# Altium PCB PCB1.PcbDoc (part 2 of 5)
Units mm, origin at the board's own origin, x right, y up, seen from the top; angles counter-clockwise.
Board outline 200 x 110 mm, 4 copper layers (Top Layer, Power Layer, GND Layer, Bottom Layer), stack 1.714 mm thick; 627 components, 400 nets, 2020 pads, 570 vias.
Unrouted connection lines stored in the file: 110.
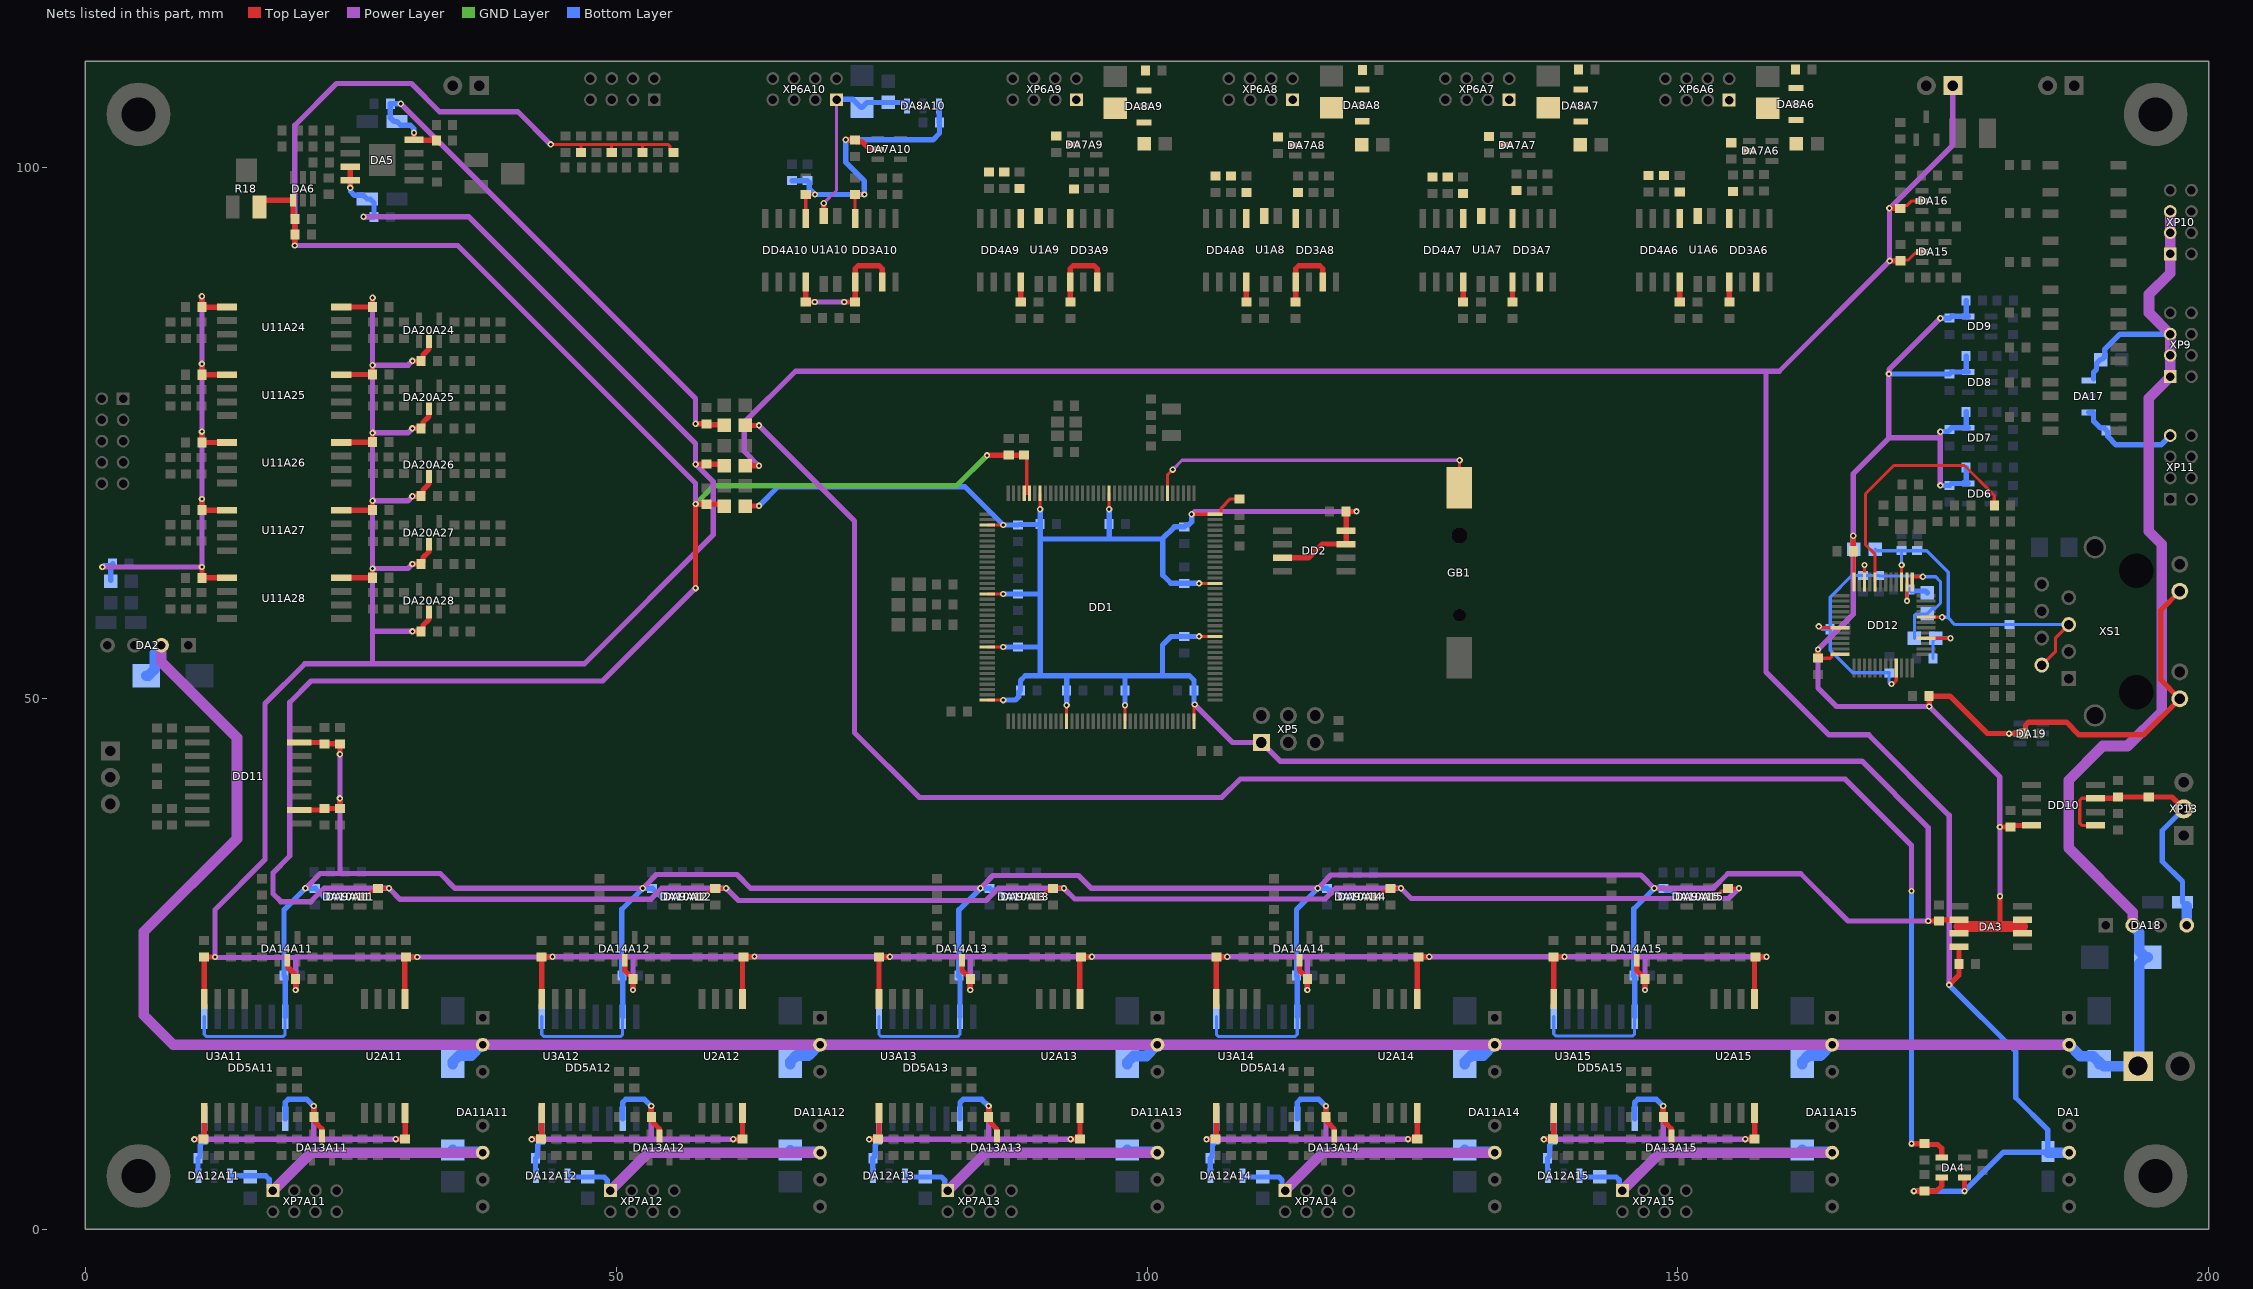
[diagram p4: the nets of this part, all layers, seen from the top]

## Footprints (in the part's own frame and the unit in brackets; to place one, negate y for a bottom-side part, rotate by r counter-clockwise, add the part's x,y. Pads: shape width x height; smd on the part's side, far side on the other; paste and mask are expansions set on the pad) (continued)
B8B-PHDSS [mm]
  rect 1.2x1.2 hole 0.8: 1(0,0)
  round 1.2 hole 0.8: 2(0,2) 3(-2,0) 4(-2,2) 5(-4,0) 6(-4,2) 7(-6,0) 8(-6,2)
  silkscreen extent -7.93,-2.47 1.97,3.52, body extent -7.93,-1.48 1.97,3.52, height 6.5
B10B-PHDSS [mm]
  rect 1.2x1.2 hole 0.8: 1(0,0)
  round 1.2 hole 0.8: 2(0,2) 3(-2,0) 4(-2,2) 5(-4,0) 6(-4,2) 7(-6,0) 8(-6,2) 9(-8,0) 10(-8,2)
  silkscreen extent -9.92,-2.47 1.95,3.5, body extent -9.95,-1.5 1.95,3.5, height 6.5
CAP_0603 [mm]
  rect 0.85x0.95 smd: 1(0.025,0) 2(1.575,0)
  silkscreen extent -0.58,-0.65 2.17,0.65, body extent 0.02,-0.43 1.63,0.44, height 0.8
CAP_0805 [mm]
  rect 1.27x1.27 smd: 1(0,0) 2(2,0)
  silkscreen extent -0.85,-0.85 2.85,0.85, body extent 0,-0.63 2,0.62, height 1
CAP_1206 [mm]
  rect 1.6x1.8 smd: 1(0,0) 2(2.8,0)
  silkscreen extent -1.02,-1.12 3.83,1.12, body extent -0.25,-0.77 2.95,0.83, height 0.94
CAP_A [mm]
  rect 2x1.2 smd: 1(0,0) 2(2.8,0)
  silkscreen extent -2.15,-0.82 4.03,0.82, body extent -0.33,-0.8 3.13,0.8, height 1.65
CAP_B [mm]
  rect 2x2.2 smd: 1(0,0) 2(3,0)
  silkscreen extent -2.15,-1.4 4.25,1.4, body extent -0.25,-1.4 3.25,1.4, height 1.9
CAP_C [mm]
  rect 2.6x2.2 smd: 1(0,0) 2(5,0)
  silkscreen extent -2.4,-1.58 6.53,1.6, body extent -0.5,-1.6 5.5,1.6, height 2.5
DS1092-12-N8S [mm]
  rect 3.9x2.4 smd: 1(0,0) 2(16,0)
  round 1.2 hole 1.2: 1(4,0)
  round 1.5 hole 1.5: 1(11.5,0)
  silkscreen extent 0,-7.37 17.4,7.37, body extent -1.4,-7.37 17.4,7.37, height 4.23
IND_0805 [mm]
  rect 1.27x1.27 smd: 1(0,0) 2(2,0)
  silkscreen extent -0.85,-0.85 2.85,0.85, body extent 0,-0.62 2,0.62, height 0.85
LED_0805 [mm]
  rect 1.27x1.27 smd: 1(0,0) 2(2,0)
  silkscreen extent -0.85,-0.85 3.22,0.85, body extent -0.03,-0.46 2.03,0.45, height 0.85
LPJD0012BENL [mm]
  rect 1.4x1.4 hole 0.9: 1(0,0)
  round 1.4 hole 0.9: 2(1.27,2.54) 3(2.54,0) 4(3.81,2.54) 5(5.08,0) 6(6.35,2.54) 7(7.62,0) 8(8.89,2.54)
  round 1.6 hole 1.02: 9(-1.907,-10.46) 10(0.633,-10.46) 11(8.223,-10.46) 12(10.763,-10.46)
  round 2.1 hole 1.6: 13(-3.475,-2.46) 14(12.365,-2.46)
  round 0 hole 3.25 unplated: ""(-1.27,-6.35) ""(10.16,-6.35)
  silkscreen extent -3.57,-13.08 12.42,3.62, body extent -3.57,-13.08 12.42,3.63, height 17.4
LQFP-48 [mm]
  rect 1.8x0.3 smd: 1(0,0) 2(0,-0.5) 3(0,-1) 4(0,-1.5) 5(0,-2) 6(0,-2.5) 7(0,-3) 8(0,-3.5) 9(0,-4) 10(0,-4.5) 11(0,-5) 12(0,-5.5) 25(8.1,-5.5) 26(8.1,-5) 27(8.1,-4.5) 28(8.1,-4) 29(8.1,-3.5) 30(8.1,-3) 31(8.1,-2.5) 32(8.1,-2) 33(8.1,-1.5) 34(8.1,-1) 35(8.1,-0.5) 36(8.1,0)
  rect 0.3x1.8 smd: 13(1.3,-6.8) 14(1.8,-6.8) 15(2.3,-6.8) 16(2.8,-6.8) 17(3.3,-6.8) 18(3.8,-6.8) 19(4.3,-6.8) 20(4.8,-6.8) 21(5.3,-6.8) 22(5.8,-6.8) 23(6.3,-6.8) 24(6.8,-6.8) 37(6.8,1.3) 38(6.3,1.3) 39(5.8,1.3) 40(5.3,1.3) 41(4.8,1.3) 42(4.3,1.3) 43(3.8,1.3) 44(3.3,1.3) 45(2.8,1.3) 46(2.3,1.3) 47(1.8,1.3) 48(1.3,1.3)
  silkscreen extent -0.13,-5.6 6.9,0.92, body extent -0.45,-7.25 8.55,1.75, height 1.6
LQFP-144 [mm]
  rect 1.45x0.3 smd: 1(0,0) 2(0,-0.5) 3(0,-1) 4(0,-1.5) 5(0,-2) 6(0,-2.5) 7(0,-3) 8(0,-3.5) 9(0,-4) 10(0,-4.5) 11(0,-5) 12(0,-5.5) 13(0,-6) 14(0,-6.5) 15(0,-7) 16(0,-7.5) 17(0,-8) 18(0,-8.5) 19(0,-9) 20(0,-9.5) 21(0,-10) 22(0,-10.5) 23(0,-11) 24(0,-11.5) 25(0,-12) 26(0,-12.5) 27(0,-13) 28(0,-13.5) 29(0,-14) 30(0,-14.5) 31(0,-15) 32(0,-15.5) 33(0,-16) 34(0,-16.5) 35(0,-17) 36(0,-17.5) 73(21.45,-17.5) 74(21.45,-17) 75(21.45,-16.5) 76(21.45,-16) 77(21.45,-15.5) 78(21.45,-15) 79(21.45,-14.5) 80(21.45,-14) 81(21.45,-13.5) 82(21.45,-13) 83(21.45,-12.5) 84(21.45,-12) 85(21.45,-11.5) 86(21.45,-11) 87(21.45,-10.5) 88(21.45,-10) 89(21.45,-9.5) 90(21.45,-9) 91(21.45,-8.5) 92(21.45,-8) 93(21.45,-7.5) 94(21.45,-7) 95(21.45,-6.5) 96(21.45,-6) 97(21.45,-5.5) 98(21.45,-5) 99(21.45,-4.5) 100(21.45,-4) 101(21.45,-3.5) 102(21.45,-3) 103(21.45,-2.5) 104(21.45,-2) 105(21.45,-1.5) 106(21.45,-1) 107(21.45,-0.5) 108(21.45,0)
  rect 0.3x1.45 smd: 37(1.975,-19.475) 38(2.475,-19.475) 39(2.975,-19.475) 40(3.475,-19.475) 41(3.975,-19.475) 42(4.475,-19.475) 43(4.975,-19.475) 44(5.475,-19.475) 45(5.975,-19.475) 46(6.475,-19.475) 47(6.975,-19.475) 48(7.475,-19.475) 49(7.975,-19.475) 50(8.475,-19.475) 51(8.975,-19.475) 52(9.475,-19.475) 53(9.975,-19.475) 54(10.475,-19.475) 55(10.975,-19.475) 56(11.475,-19.475) 57(11.975,-19.475) 58(12.475,-19.475) 59(12.975,-19.475) 60(13.475,-19.475) 61(13.975,-19.475) 62(14.475,-19.475) 63(14.975,-19.475) 64(15.475,-19.475) 65(15.975,-19.475) 66(16.475,-19.475) 67(16.975,-19.475) 68(17.475,-19.475) 69(17.975,-19.475) 70(18.475,-19.475) 71(18.975,-19.475) 72(19.475,-19.475) 109(19.475,1.975) 110(18.975,1.975) 111(18.475,1.975) 112(17.975,1.975) 113(17.475,1.975) 114(16.975,1.975) 115(16.475,1.975) 116(15.975,1.975) 117(15.475,1.975) 118(14.975,1.975) 119(14.475,1.975) 120(13.975,1.975) 121(13.475,1.975) 122(12.975,1.975) 123(12.475,1.975) 124(11.975,1.975) 125(11.475,1.975) 126(10.975,1.975) 127(10.475,1.975) 128(9.975,1.975) 129(9.475,1.975) 130(8.975,1.975) 131(8.475,1.975) 132(7.975,1.975) 133(7.475,1.975) 134(6.975,1.975) 135(6.475,1.975) 136(5.975,1.975) 137(5.475,1.975) 138(4.975,1.975) 139(4.475,1.975) 140(3.975,1.975) 141(3.475,1.975) 142(2.975,1.975) 143(2.475,1.975) 144(1.975,1.975)
  silkscreen extent -0.12,-18.35 20.33,0.85, body extent -0.28,-19.75 21.72,2.25, height 1.63
NX2520SA [mm]
  rect 1.2x1 smd: 1(0,0) 2(1.7,0) 3(1.7,1.3) 4(0,1.3)
  silkscreen extent -0.8,-0.7 2.5,2, body extent -0.4,-0.35 2.1,1.65, height 0.65
NX3215SA [mm]
  rect 1x1.8 smd: 1(0,0) 2(2.5,0)
  silkscreen extent -0.7,-1.1 3.2,1.1, body extent -0.35,-0.75 2.85,0.75, height 0.8
PLD-6 [mm]
  rect 1.6x1.6 hole 1: 1(0,0)
  round 1.6 hole 1: 2(0,2.54) 3(2.54,0) 4(2.54,2.54) 5(5.08,0) 6(5.08,2.54)
  silkscreen extent -1.27,-2.12 6.27,3.81, body extent -1.3,-1.2 6.32,3.8, height 8.5
RES_0603 [mm]
  rect 0.85x0.95 smd: 1(0.025,0) 2(1.575,0)
  silkscreen extent -0.58,-0.65 2.17,0.65, body extent -0.05,-0.48 1.65,0.48, height 0.6
RES_0805 [mm]
  rect 1.27x1.27 smd: 1(0,0) 2(2,0)
  silkscreen extent -0.85,-0.85 2.85,0.85, body extent 0,-0.62 2,0.62, height 0.6
RES_1210 [mm]
  rect 1.6x2.8 smd: 1(-0.025,0.025) 2(2.775,0.025)
  silkscreen extent -1.02,-1.58 3.77,1.63, body extent -0.15,-1.28 2.95,1.33, height 0.57
SOIC-8 [mm]
  rect 1.8x0.6 smd: 1(0,0) 2(0,-1.25) 3(0,-2.55) 4(0,-3.8) 5(6,-3.8) 6(6,-2.55) 7(6,-1.25) 8(6,0)
  silkscreen extent -0.12,-4.38 4.8,0.87, body extent -0.13,-4.37 6.08,0.63, height 1.75
"SOIC-8 EPAD" [mm]
  rect 1.8x0.6 smd: 1(0,0) 2(0,-1.25) 3(0,-2.55) 4(0,-3.8) 5(6,-3.8) 6(6,-2.55) 7(6,-1.25) 8(6,0)
  rect 2.5x3 smd: EPAD(3,-1.9)
  silkscreen extent -0.13,-4.38 4.8,0.87, body extent -0.13,-4.37 6.08,0.63, height 1.75
SOIC-16IC [mm]
  rect 2.3x0.6 smd: 1(0,0) 2(0,-1.27) 3(0,-2.54) 4(0,-3.81) 5(0,-5.08) 6(0,-6.35) 7(0,-7.62) 8(0,-8.89) 9(9.6,-8.89) 10(9.6,-7.62) 11(9.6,-6.35) 12(9.6,-5.08) 13(9.6,-3.81) 14(9.6,-2.54) 15(9.6,-1.27) 16(9.6,0)
  silkscreen extent -0.15,-10.9 8.03,2, body extent -0.38,-10.9 9.93,2, height 2.64
SOIC-16W [mm]
  rect 2.3x0.6 smd: 1(0,0) 2(0,-1.27) 3(0,-2.54) 4(0,-3.81) 5(0,-5.08) 6(0,-6.35) 7(0,-7.62) 8(0,-8.89) 9(9.6,-8.89) 10(9.6,-7.62) 11(9.6,-6.35) 12(9.6,-5.08) 13(9.6,-3.81) 14(9.6,-2.54) 15(9.6,-1.27) 16(9.6,0)
  silkscreen extent -0.15,-9.9 8.03,1, body extent -0.52,-9.7 10.11,0.8, height 2.62
SOT-23-3 [mm]
  rect 1.2x0.55 smd: 1(0,0) 2(0,-1.9) 3(2.15,-0.95)
  silkscreen extent -0.27,-2.5 2,0.65, body extent -0.15,-2.45 2.35,0.55, height 1
SOT-23-5 [mm]
  rect 1.2x0.55 smd: 1(0,0) 2(0,-0.95) 3(0,-1.9) 4(2.15,-1.9) 5(2.15,0)
  silkscreen extent -0.27,-2.5 1.97,0.65, body extent -0.15,-2.45 2.35,0.55, height 1.1
SOT-23-6 [mm]
  rect 1.2x0.55 smd: 1(0,0) 2(0,-0.95) 3(0,-1.9) 4(2.15,-1.9) 5(2.15,-0.95) 6(2.15,0)
  silkscreen extent -0.27,-2.5 1.97,0.65, body extent -0.3,-2.4 2.5,0.5, height 1.18
SOT-89 [mm]
  rect 0.57x1.4 smd: 1(0,0) 3(3,0)
  rect 0.65x1.4 smd: 2(1.5,0)
  Top Layer region: 1.825,0.7 2.5,1.375 2.5,3.825 0.5,3.825 0.5,1.375 1.175,0.7 1.175,-0.7 1.825,-0.7
  Top Layer lines w0.2: 1.5,-0.075 1.5,0
  silkscreen extent -0.82,-0.07 3.75,3, body extent -0.75,-0.43 3.75,3.57, height 1.5
SSO-8 [mm]
  rect 1.905x0.64 smd: 1(0,0) 2(0,-1.275) 3(0,-2.55) 4(0,-3.825) 5(10.75,-3.825) 6(10.75,-2.55) 7(10.75,-1.275) 8(10.75,0)
  silkscreen extent -0.12,-4.82 9,1.02, body extent -0.33,-4.82 11.18,1.03, height 3.61
"TME (SIP-4)" [mm]
  rect 1.4x1.4 hole 0.8: 1(0,0)
  round 1.4 hole 0.8: 2(2.54,0) 3(5.08,0) 4(7.62,0)
  silkscreen extent -1.9,-1.7 9.6,5.4, body extent -1.9,-1.7 9.6,5.4, height 10.2
"TMR3 (SIP-8)" [mm]
  rect 1.3x1.3 hole 0.7: 1(0,0)
  round 1.3 hole 0.7: 2(2.54,0) 3(5.08,0) 5(10.16,0) 6(12.7,0) 7(15.24,0) 8(17.78,0)
  silkscreen extent -2,-5.58 19.8,3.5, body extent -2,-5.6 19.8,3.5, height 11.2

## Part data
C1 C2 C3 C4 C37 C40 C54A6 C54A7 C54A8 C54A9 C54A10 C57A11 C57A12 C57A13 C57A14 C57A15 C59A11 C59A12 C59A13 C59A14 C59A15 C91 C94: library part Capacitor_Polar
  C1 C2 C57A11 C57A12 C57A13 C57A14 C57A15 C91: Model="TECAP, 10 мкФ, 35 В, тип C, 10%"
  C3 C4 C37 C40 C94: Model="TECAP, 10 мкФ, 10 В, тип A, 10%"
  C54A6 C54A7 C54A8 C54A9 C54A10 C59A11 C59A12 C59A13 C59A14 C59A15: Model="TECAP, 10 мкФ, 25 В, тип B, 10%"
C5 C6 C7 C8 C9 C10 C11 C13 C14 C15 C16 C17 C18 C20 C21 C22 C23 C24 C25 C26 C27 C28 C29 C30 C31 C32 C33 C34 C35 C36 C38 C39 C41 C42 C43 C44 C45A2 C45A3 C45A4 C45A5 C46A6 C46A7 C46A8 C46A9 C46A10 C47A6 C47A7 C47A8 C47A9 C47A10 C48A6 C48A7 C48A8 C48A9 C48A10 C49A6 C49A7 C49A8 C49A9 C49A10 C50A6 C50A7 C50A8 C50A9 C50A10 C51A6 C51A7 C51A8 C51A9 C51A10 C52A6 C52A7 C52A8 C52A9 C52A10 C53A6 C53A7 C53A8 C53A9 C53A10 C55A11 C55A12 C55A13 C55A14 C55A15 C56A11 C56A12 C56A13 C56A14 C56A15 C58A11 C58A12 C58A13 C58A14 C58A15 C60A11 C60A12 C60A13 C60A14 C60A15 C61A11 C61A12 C61A13 C61A14 C61A15 C62A11 C62A12 C62A13 C62A14 C62A15 C63A11 C63A12 C63A13 C63A14 C63A15 C64A11 C64A12 C64A13 C64A14 C64A15 C65A11 C65A12 C65A13 C65A14 C65A15 C66A11 C66A12 C66A13 C66A14 C66A15 C67A11 C67A12 C67A13 C67A14 C67A15 C68A11 C68A12 C68A13 C68A14 C68A15 C69A11 C69A12 C69A13 C69A14 C69A15 C70A11 C70A12 C70A13 C70A14 C70A15 C71A11 C71A12 C71A13 C71A14 C71A15 C72A11 C72A12 C72A13 C72A14 C72A15 C73A11 C73A12 C73A13 C73A14 C73A15 C74A11 C74A12 C74A13 C74A14 C74A15 C75A11 C75A12 C75A13 C75A14 C75A15 C76A11 C76A12 C76A13 C76A14 C76A15 C77 C78 C79 C80 C81 C82 C83 C84 C85 C86 C87 C88 C89 C90 C92 C93 C95 C96 C97 C98 C99 C100 C101 C102 C103 C104 C106 C107 C108 C109 C111 C113 C114 C115 C116 C117 C118 C119 C120 C121A24 C121A25 C121A26 C121A27 C121A28 C122A24 C122A25 C122A26 C122A27 C122A28 C123A24 C123A25 C123A26 C123A27 C123A28 C124A24 C124A25 C124A26 C124A27 C124A28 C125A24 C125A25 C125A26 C125A27 C125A28 C126A24 C126A25 C126A26 C126A27 C126A28 C127A24 C127A25 C127A26 C127A27 C127A28: library part Capacitor, Manufacturer=Murata
  C5 C6 C7 C10 C14 C16 C17 C18 C21 C23 C24 C25 C26 C27 C28 C29 C30 C32 C33 C34 C35 C38 C39 C41 C43 C45A2 C45A3 C45A4 C45A5 C46A6 C46A7 C46A8 C46A9 C46A10 C47A6 C47A7 C47A8 C47A9 C47A10 C48A6 C48A7 C48A8 C48A9 C48A10 C49A6 C49A7 C49A8 C49A9 C49A10 C52A6 C52A7 C52A8 C52A9 C52A10 C53A6 C53A7 C53A8 C53A9 C53A10 C56A11 C56A12 C56A13 C56A14 C56A15 C58A11 C58A12 C58A13 C58A14 C58A15 C60A11 C60A12 C60A13 C60A14 C60A15 C61A11 C61A12 C61A13 C61A14 C61A15 C64A11 C64A12 C64A13 C64A14 C64A15 C66A11 C66A12 C66A13 C66A14 C66A15 C67A11 C67A12 C67A13 C67A14 C67A15 C68A11 C68A12 C68A13 C68A14 C68A15 C71A11 C71A12 C71A13 C71A14 C71A15 C72A11 C72A12 C72A13 C72A14 C72A15 C73A11 C73A12 C73A13 C73A14 C73A15 C76A11 C76A12 C76A13 C76A14 C76A15 C78 C79 C82 C86 C87 C88 C90 C92 C93 C95 C96 C98 C101 C102 C104 C106 C107 C108 C109 C111 C113 C114 C115 C116 C117 C118 C119 C120 C121A24 C121A25 C121A26 C121A27 C121A28 C123A24 C123A25 C123A26 C123A27 C123A28 C125A24 C125A25 C125A26 C125A27 C125A28 C127A24 C127A25 C127A26 C127A27 C127A28: Model=GRM188R71H104KA93D
  C8 C11 C15 C97 C103: Model=GRM188R61E106KA73D
  C9 C50A6 C50A7 C50A8 C50A9 C50A10 C77 C83 C84 C85 C89: Model=GRM188R61H105KAALD
  C13 C20: Model=GRM1885C1H180FA01D
  C22 C31 C44: Model=GRM188R61H225KE11D
  C36 C42: Model=GRM1885C1H220JA01D
  C51A6 C51A7 C51A8 C51A9 C51A10 C65A11 C65A12 C65A13 C65A14 C65A15 C81: Model=GRM219R71H334KA88D
  C55A11 C55A12 C55A13 C55A14 C55A15: Model=GRM188R71H103JA01D
  C62A11 C62A12 C62A13 C62A14 C62A15 C63A11 C63A12 C63A13 C63A14 C63A15 C69A11 C69A12 C69A13 C69A14 C69A15 C70A11 C70A12 C70A13 C70A14 C70A15 C74A11 C74A12 C74A13 C74A14 C74A15 C75A11 C75A12 C75A13 C75A14 C75A15 C80 C122A24 C122A25 C122A26 C122A27 C122A28 C124A24 C124A25 C124A26 C124A27 C124A28 C126A24 C126A25 C126A26 C126A27 C126A28: Model=GRM1885C1H101JA01D
  C99 C100: Model=GRM188R71H103KA01D
C12 C19 C105 C110 C112: library part Capacitor, Manufacturer=Yageo
  C12 C19 C110 C112: Model=CC0603CRNPO9BN8R0
  C105: Model=CC1206KKX7RDBB102
DA1 DA11A11 DA11A12 DA11A13 DA11A14 DA11A15: library part TMR3, Manufacturer="Traco Power"
  DA1: Model="TMR 6-2411"
  DA11A11 DA11A12 DA11A13 DA11A14 DA11A15: Model="TMR 2412"
DA2 DA18: library part TME, Manufacturer="Traco Power", Model="TME 2405S"
DA3: library part LD1117D33, Manufacturer=STMicroelectronics, Model=LD1117D33CTR
DA4: Manufacturer="Texas Instruments", Model=LM2776DBVR
DA5 DD11: Manufacturer="Analog Devices"
  DA5: Model=ADA4817-1ARDZ
  DD11: Model=ADM2682EBRIZ
DA6: library part TLV3501, Manufacturer="Texas Instruments", Model=TLV3501AIDBVR
DA7A6 DA7A7 DA7A8 DA7A9 DA7A10 DA10A11 DA10A12 DA10A13 DA10A14 DA10A15 DA13A11 DA13A12 DA13A13 DA13A14 DA13A15 DA14A11 DA14A12 DA14A13 DA14A14 DA14A15 DA15 DA16 DA20A24 DA20A25 DA20A26 DA20A27 DA20A28: library part LMC7101, Manufacturer="Texas Instruments", Model=LMC7101BIM5
DA8A6 DA8A7 DA8A8 DA8A9 DA8A10 DA12A11 DA12A12 DA12A13 DA12A14 DA12A15 DA17: library part LD2981ABU50TR, Manufacturer=STMicroelectronics
  DA8A6 DA8A7 DA8A8 DA8A9 DA8A10 DA12A11 DA12A12 DA12A13 DA12A14 DA12A15: Model=L78L05ABUTR
  DA17: Model=L78L12ABUTR
DA9A11 DA9A12 DA9A13 DA9A14 DA9A15: library part SN74LVC1G3157, Manufacturer="Texas Instruments", Model=SN74LVC1G3157DBV
DA19: library part TPD4S009, Manufacturer="Texas Instruments", Model=TPD4S009DBVR
DD1: library part STM32F405ZG, Manufacturer=STMicroelectronics, Model=STM32F405ZGT6
DD2: library part W25Q, Manufacturer=Winbond, Model=W25Q16JVSNIQ
DD3A6 DD3A7 DD3A8 DD3A9 DD3A10 DD10: library part ADUM1100, Manufacturer="Analog Devices", Model=ADUM1100BR
DD4A6 DD4A7 DD4A8 DD4A9 DD4A10: library part ADUM1200, Manufacturer="Analog Devices", Model=ADUM1200CR
DD5A11 DD5A12 DD5A13 DD5A14 DD5A15: library part ADUM1402, Manufacturer="Analog Devices", Model=ADUM1402CRW
DD6 DD7 DD8 DD9: library part SN74LVC1G17, Manufacturer="Texas Instruments", Model=SN74LVC1G17DBV
DD12: library part W5100S, Manufacturer=Wiznet, Model=W5100S-L
GB1: library part Accumulator, Manufacturer=Connfly, Model=DS1092-12-N8S
L1 L2 L3 L4 L5 L6 L7: library part Inductor, Manufacturer=Murata, Model=BLM21PG221SN1D
R1 R2 R3 R4 R5 R6 R7 R8 R9 R10 R12 R14 R15 R16 R17 R19A2 R19A3 R19A4 R19A5 R20A2 R20A3 R20A4 R20A5 R21A6 R21A7 R21A8 R21A9 R21A10 R22A6 R22A7 R22A8 R22A9 R22A10 R23A6 R23A7 R23A8 R23A9 R23A10 R24A6 R24A7 R24A8 R24A9 R24A10 R25A11 R25A12 R25A13 R25A14 R25A15 R26A11 R26A12 R26A13 R26A14 R26A15 R27A11 R27A12 R27A13 R27A14 R27A15 R28A11 R28A12 R28A13 R28A14 R28A15 R29A11 R29A12 R29A13 R29A14 R29A15 R30A11 R30A12 R30A13 R30A14 R30A15 R31A11 R31A12 R31A13 R31A14 R31A15 R32A11 R32A12 R32A13 R32A14 R32A15 R33A11 R33A12 R33A13 R33A14 R33A15 R34A11 R34A12 R34A13 R34A14 R34A15 R35A11 R35A12 R35A13 R35A14 R35A15 R36A11 R36A12 R36A13 R36A14 R36A15 R37A11 R37A12 R37A13 R37A14 R37A15 R38A11 R38A12 R38A13 R38A14 R38A15 R39A11 R39A12 R39A13 R39A14 R39A15 R40A11 R40A12 R40A13 R40A14 R40A15 R41 R42 R43 R44 R45 R46 R47 R48 R49 R50 R51 R52 R53 R54 R55 R56 R57 R58 R59 R60 R61 R62 R63 R64 R65 R66 R67 R68 R69 R70 R71 R72 R73 R74 R75 R76 R77 R78 R79 R80A24 R80A25 R80A26 R80A27 R80A28 R81A24 R81A25 R81A26 R81A27 R81A28 R82A24 R82A25 R82A26 R82A27 R82A28 R83A24 R83A25 R83A26 R83A27 R83A28 R84A24 R84A25 R84A26 R84A27 R84A28 R85A24 R85A25 R85A26 R85A27 R85A28 R86A24 R86A25 R86A26 R86A27 R86A28: library part Resistor, Manufacturer=Yageo
  R1 R2 R3 R4: Model=RC0805FR-070RL
  R5 R9 R15 R16 R17 R19A2 R19A3 R19A4 R19A5 R20A2 R20A3 R20A4 R20A5 R22A6 R22A7 R22A8 R22A9 R22A10 R23A6 R23A7 R23A8 R23A9 R23A10 R24A6 R24A7 R24A8 R24A9 R24A10 R25A11 R25A12 R25A13 R25A14 R25A15 R28A11 R28A12 R28A13 R28A14 R28A15 R29A11 R29A12 R29A13 R29A14 R29A15 R30A11 R30A12 R30A13 R30A14 R30A15 R31A11 R31A12 R31A13 R31A14 R31A15 R32A11 R32A12 R32A13 R32A14 R32A15 R33A11 R33A12 R33A13 R33A14 R33A15 R36A11 R36A12 R36A13 R36A14 R36A15 R37A11 R37A12 R37A13 R37A14 R37A15 R40A11 R40A12 R40A13 R40A14 R40A15 R41 R43 R45 R46 R57 R58 R59 R62 R63 R79 R81A24 R81A25 R81A26 R81A27 R81A28 R82A24 R82A25 R82A26 R82A27 R82A28 R83A24 R83A25 R83A26 R83A27 R83A28 R86A24 R86A25 R86A26 R86A27 R86A28: Model=RC0603FR-0710KL
  R6 R7 R8 R21A6 R21A7 R21A8 R21A9 R21A10 R44 R48 R49 R50 R51 R52 R53 R60: Model=RC0603FR-07200RL
  R10 R12 R78: Model=RC0603FR-070RL
  R14: Model=RC0603FR-075K1L
  R26A11 R26A12 R26A13 R26A14 R26A15: Model=RC0603FR-076K49L
  R27A11 R27A12 R27A13 R27A14 R27A15 R80A24 R80A25 R80A26 R80A27 R80A28: Model=RC0603FR-0715KL
  R34A11 R34A12 R34A13 R34A14 R34A15 R38A11 R38A12 R38A13 R38A14 R38A15: Model=RC0603FR-0724K9L
  R35A11 R35A12 R35A13 R35A14 R35A15 R39A11 R39A12 R39A13 R39A14 R39A15 R84A24 R84A25 R84A26 R84A27 R84A28 R85A24 R85A25 R85A26 R85A27 R85A28: Model=RC0603FR-0716K5L
  R42 R77: Model=RC0603FR-0712KL
  R47: Model=RC1210FR-0710RL
  R54 R55 R56 R61 R71 R74: Model=RC0603FR-071KL
  R64: Model=RC0603FR-07120RL
  R65 R66 R67 R68: Model=RC0603FR-0749R9L
  R69 R70 R72 R73: Model=RC0603FR-073R3L
  R75: Model=RC0603FR-07300RL
  R76: Model=RC0603FR-071ML
R11 R18: library part Resistor_Variable, Manufacturer=Bourns
  R11: Model=3224W-1-205
  R18: Model=3224W-1-103
R13: library part Resistor
U1A6 U1A7 U1A8 U1A9 U1A10 U4 U5 U6 U10: library part TLP291, Manufacturer=Toshiba, Model=TLP291(GB-TP,SE
U2A11 U2A12 U2A13 U2A14 U2A15 U3A11 U3A12 U3A13 U3A14 U3A15 U11A24 U11A25 U11A26 U11A27 U11A28: library part ACPL-C87, Manufacturer=Broadcom, Model=ACPL-C87A-500E
U7 U8 U9: Manufacturer=Toshiba, Model=TLP127
VD1 VD2 VD3: library part LED, Manufacturer=Kingbright
  VD1: Model=KP-2012MGC
  VD2: Model=KP-2012SYC
  VD3: Model=KP-2012EC
VT1: library part "MOSFET N-channel", Manufacturer=UMW, Model=AO3400A
XP1 XP4 XP8 XP12: library part Connector-2, Manufacturer=JST
  XP1 XP8 XP12: Model=B2B-EH-A
  XP4: Model=B2P-VH
XP2 XP6A6 XP6A7 XP6A8 XP6A9 XP6A10 XP7A11 XP7A12 XP7A13 XP7A14 XP7A15 XP9 XP10 XP11: library part Connector-8, Manufacturer=JST, Model=B8B-PHDSS
XP3: library part Connector-10, Manufacturer=JST, Model=B10B-PHDSS
XP5: library part Connector-6, Manufacturer=Connfly, Model=PLD-6
XP13 XP14: library part Connector-3, Manufacturer=JST, Model=B3B-EH-A
XS1: Manufacturer=LINK-PP, Model=LPJD0012BENL
ZQ1: library part Quartz_Resonator_4-pin, Manufacturer=NDK, Model=NX2520SA-16MHZ-STD-CSW-5
ZQ2: library part Quartz_Resonator, Manufacturer=NDK, Model="NX3215SA- 32.768K-STD-MUA-8"
ZQ3: library part Quartz_Resonator_4-pin, Manufacturer=TXC, Model=7M-25.000MAAJ-T

## Free pads (board coordinates)
  round 6 hole 3.2: ""(5,5) ""(5,105) ""(195,5) ""(195,105)

## Via types
v1: diameter 0.6, hole 0.3, Top Layer to Bottom Layer, tented both sides, 557 vias
v2: diameter 0.6, hole 0.3, Top Layer to Bottom Layer, 12 vias
v3: diameter 0.5, hole 0.2, Top Layer to Bottom Layer, tented both sides, 1 vias

## Nets (pads, with @x,y where several pads share a name; then routed paths per layer and width w, separated by ;. In a path a pad name is that pad's centre, name@x,y a point inside that pad or via, vN(x,y) a via of type N, cw(c..) or ccw(c..) an arc to the next point about the centre after c; other vN are vias at no path point)
1V2A: C114.1 DD12.4 L6.2 | length 5.7
  Top Layer w0.3: DD12.4@173.375,55.65 v1(175.675,55.65)
  Bottom Layer w0.3: C114.1@174.025,53.75 174.025,55.4 174.275,55.65 v1(175.675,55.65)
1V2D: C113.1 C117.1 C119.1 C120.1 DD12.13 DD12.22 DD12.31 DD12.45 L5.2 L6.1 | length 40.3
  Top Layer w0.3: v1(163.275,56.775) 163.356,56.775 163.481,56.65 DD12.31@165.275,56.65 ; DD12.22@167.575,60.951 167.575,61.75 v1(167.575,62.55) ; v1(170.125,51.35) 170.182,51.407 170.318,51.407 170.575,51.664 DD12.45@170.575,52.85 ; DD12.13@172.075,60.951 172.075,61.45 v1(173.075,61.45)
  Bottom Layer w0.3: v1(163.275,56.775) 163.315,56.775 163.589,56.5 C117.1@164.345,56.5 164.345,59.52 166.385,61.56 C120.1@167.425,61.56 167.575,61.71 v1(167.575,62.55) ; C117.1@164.295,56.45 C117.1@164.345,56.5 164.345,54.53 166.474,52.4 C113.1@169.925,52.4 ; C120.1@167.575,61.56 C119.1@168.925,61.56 168.98,61.505 173.02,61.505 v1(173.075,61.45) 174.28,61.45 174.74,60.99 174.74,58.961 174.214,58.435 173.96,58.435 L5.2@173.475,57.95 172.451,57.95 172.275,57.774 L6.1@172.275,55.65 ; C113.1@169.896,52.4 169.896,51.45 169.95,51.396 169.95,51.375 170.1,51.375 v1(170.125,51.35)
1V2O: C109.1 DD12.14 L5.1 | length 4.7
  Top Layer w0.3: v1(171.575,59.175) DD12.14@171.575,60.951
  Bottom Layer w0.3: v1(171.575,59.175) 171.593,59.193 171.593,59.618 171.6,59.625 171.6,59.975 C109.1@171.875,60.25
  Bottom Layer w0.5: C109.1@171.875,60.25 172.025,60.1 173.325,60.1 L5.1@173.475,59.95
+3.3V: C10.1 C11.1 C16.2 C23.2 C24.1 C25.1 C26.1 C28.2 C29.2 C30.2 C32.1 C33.2 C34.1 C35.1 C46A6.1 C46A7.1 C46A8.1 C46A9.1 C46A10.1 C47A6.1 C47A7.1 C47A8.1 C47A9.1 C47A10.1 C56A11.1 C56A12.1 C56A13.1 C56A14.1 C56A15.1 C64A11.1 C64A12.1 C64A13.1 C64A14.1 C64A15.1 C86.1 C87.1 C88.1 C90.1 C95.1 C96.1 C97.1 C98.1 C99.2 C106.1 C111.1 C116.1 DA3.2 DA3.3 DA3.6 DA3.7 DA10A11.2 DA10A12.2 DA10A13.2 DA10A14.2 DA10A15.2 DA19.5 DD1.17 DD1.30 DD1.39 DD1.52 DD1.62 DD1.72 DD1.84 DD1.95 DD1.108 DD1.121 DD1.131 DD1.144 DD2.3 DD2.7 DD2.8 DD3A6.1 DD3A6.3 DD3A7.1 DD3A7.3 DD3A8.1 DD3A8.3 DD3A9.1 DD3A9.3 DD3A10.1 DD3A10.3 DD4A6.8 DD4A7.8 DD4A8.8 DD4A9.8 DD4A10.8 DD5A11.1 DD5A11.7 DD5A12.1 DD5A12.7 DD5A13.1 DD5A13.7 DD5A14.1 DD5A14.7 DD5A15.1 DD5A15.7 DD6.5 DD7.5 DD8.5 DD9.5 DD10.8 DD11.2 DD11.7 DD12.24 DD12.36 L3.1 L7.1 R10.2 R57.2 R58.2 R59.2 R62.2 R79.2 XP5.1 XS1.9 XS1.11 | length 771.1
  Top Layer w0.3: DD1.72@84.95,49.825 v1(86.45,49.825) ; DD1.62@84.95,54.825 v1(86.45,54.825) ; DD1.52@84.95,59.825 v1(86.45,59.825) ; DD1.39@84.95,66.325 v1(86.45,66.325) ; v1(89.925,67.8) DD1.30@89.925,69.3 ; DD1.84@92.425,47.85 92.425,48.6 v1(92.425,49.35) ; v1(96.425,67.8) DD1.17@96.425,69.3 ; DD1.95@97.925,47.85 v1(97.925,49.35) ; v1(104.2,67.325) 105.082,67.325 DD1.144@106.4,67.325 106.975,67.325 106.975,67.9 107.85,68.775 R10.2@108.7,68.775 ; DD1.108@104.425,47.85 104.425,49.269 104.487,49.331 v1(104.487,49.412) ; v1(104.9,55.825) DD1.121@106.4,55.825 ; v1(104.9,60.825) 105.65,60.825 DD1.131@106.4,60.825 ; C116.1@163.2,53.775 164.349,53.775 164.525,53.951 164.525,54.15 DD12.36@165.275,54.15 ; C111.1@166.525,63.85 166.575,63.8 DD12.24@166.575,60.951
  Top Layer w0.5: DD11.2@20.15,39.479 22.385,39.479 C99.2@22.525,39.619 C96.1@23.975,39.619 v1(23.975,40.569) ; DD11.7@20.15,45.829 22.415,45.829 22.525,45.719 23.975,45.719 C97.1@23.975,45.694 v1(23.975,44.719) ; L3.1@62.175,68.1 62.188,68.113 63.438,68.113 v1(63.45,68.125) ; DD4A10.8@67.85,89.2 C47A10.1@67.85,87.325 v1(68.7,87.325) ; v1(71.475,87.325) C46A10.1@72.5,87.325 DD3A10.1@72.5,89.2 72.504,89.204 72.504,90.457 72.796,90.75 74.754,90.75 75.046,90.457 75.046,89.204 DD3A10.3@75.05,89.2 ; C47A9.1@88.1,87.325 DD4A9.8@88.1,89.2 ; C46A9.1@92.775,87.325 92.763,87.337 92.763,89.188 DD3A9.1@92.75,89.2 92.754,89.204 92.754,90.457 93.046,90.75 95.004,90.75 95.296,90.457 95.296,89.204 DD3A9.3@95.3,89.2 ; C47A8.1@109.35,87.325 DD4A8.8@109.35,89.2 ; DD2.3@112.75,63.225 115.2,63.225 116.5,64.525 DD2.7@118.75,64.525 DD2.8@118.75,65.775 C32.1@118.75,67.6 v1(119.725,67.6) ; C46A8.1@114,87.325 DD3A8.1@114,89.2 114.004,89.204 114.004,90.457 114.296,90.75 116.254,90.75 116.546,90.457 116.546,89.204 DD3A8.3@116.55,89.2 ; C47A7.1@129.775,87.325 DD4A7.8@129.775,89.2 ; C46A7.1@134.425,87.325 DD3A7.1@134.425,89.2 ; C47A6.1@150.175,87.325 DD4A6.8@150.175,89.2 ; DD3A6.1@154.825,89.2 154.837,89.188 154.837,87.388 C46A6.1@154.85,87.375 ; C116.1@163.2,53.775 v1(163.2,54.6) ; C111.1@166.525,63.85 v1(166.525,65.3) ; v1(173.575,29.025) 173.587,29.012 174.563,29.012 C11.1@174.575,29.025 ; v1(173.675,49.225) 173.662,49.238 173.662,50.187 R79.2@173.65,50.2 175.625,50.2 179.15,46.675 v1(181.2,46.675) C106.1@182.575,46.675 182.75,46.851 182.75,47.457 183.043,47.75 186.587,47.75 187.787,46.55 193.875,46.55 XS1.9@197.275,49.95 195.475,51.75 195.475,58.28 XS1.11@197.275,60.08 ; C11.1@174.6,29.025 174.725,29.15 DA3.2@176.475,29.15 176.475,28.5 DA3.3@176.475,27.85 ; v1(180.325,37.875) C95.1@181.325,37.875 181.475,38.025 DD10.8@183.325,38.025 ; 180.344,28.5 v1(180.344,31.348) ; DA3.6@182.475,27.85 182.475,28.5 DA3.7@182.475,29.15
  Top Layer w1: 176.475,28.5 180.344,28.5 182.475,28.5
  Power Layer w0.5: v1(20.725,32.1) 22.125,33.5 23.975,33.5 ; v1(23.975,44.719) v1(23.975,40.569) 23.975,33.5 ; v1(68.7,87.325) v1(71.475,87.325) ; v1(104.2,67.325) 104.227,67.325 104.502,67.6 v1(119.725,67.6) ; v1(104.487,49.412) 108.064,45.835 XP5.1@110.77,45.835 112.53,44.075 167.325,44.075 173.575,37.825 v1(173.575,29.025) 166.025,29.025 161.575,33.475 154.7,33.475 153.325,32.1 v1(147.775,32.1) 146.525,33.35 117.325,33.35 v1(116.075,32.1) 94.75,32.1 93.55,33.3 85.5,33.3 v1(84.3,32.1) 62.675,32.1 61.375,33.4 53.8,33.4 v1(52.5,32.1) 34.825,32.1 33.425,33.5 23.975,33.5 ; v1@169.87,80.545 169.87,74.525 ; v1(169.875,80.55) 169.894,80.569 169.894,80.969 v1(174.725,85.8) ; v1@173.657,49.225 164.95,49.225 163.2,50.975 v1(163.2,54.6) 166.525,57.925 v1(166.525,65.3) 166.525,71.18 169.87,74.525 ; v1(173.675,49.225) 180.325,42.575 v1(180.325,37.875) ; v1(174.725,70.05) 174.725,74.525 ; v1(174.725,75.1) 174.725,74.525 ; v1(180.344,31.348) v1@180.344,37.829 ; 169.87,74.525 174.725,74.525
  Bottom Layer w0.3: DD5A11.1@11.195,20 11.195,18.326 11.371,18.15 18.639,18.15 18.815,18.326 DD5A11.7@18.815,20 ; DD5A12.1@42.98,20 42.98,18.326 43.156,18.151 50.424,18.151 50.6,18.326 DD5A12.7@50.6,20 ; DD5A13.1@74.755,20 74.755,18.326 74.931,18.151 82.199,18.151 82.375,18.326 DD5A13.7@82.375,20 ; DD5A14.1@106.53,20 106.53,18.326 106.706,18.15 113.974,18.15 114.15,18.326 DD5A14.7@114.15,20 ; DD5A15.1@138.305,20 138.305,18.376 138.481,18.2 145.749,18.2 145.925,18.376 DD5A15.7@145.925,20
  Bottom Layer w0.5: C64A11.1@18.7,23.875 18.815,23.76 DD5A11.7@18.815,20 ; C64A11.1@18.7,23.925 18.7,30.075 v1@20.708,32.083 ; v1(20.725,32.1) C56A11.1@21.6,32.1 21.65,32.1 22.4,31.35 23.7,31.35 DA10A11.2@23.725,31.325 ; DD5A12.7@50.6,20 50.6,23.8 C64A12.1@50.525,23.875 50.525,30.125 v1(52.5,32.1) C56A12.1@53.375,32.1 53.425,32.1 54.175,31.35 55.475,31.35 DA10A12.2@55.5,31.325 ; v1@63.444,68.119 v1(63.45,68.125) 65.25,69.925 82.85,69.925 v1(86.45,66.325) C26.1@87.85,66.325 87.887,66.362 89.888,66.362 C10.1@89.925,66.4 ; C64A13.1@82.225,23.875 82.375,23.725 DD5A13.7@82.375,20 ; C64A13.1@82.275,23.875 82.275,30.075 v1(84.3,32.1) C56A13.1@85.175,32.1 85.35,31.925 85.9,31.925 86.475,31.35 87.275,31.35 DA10A13.2@87.3,31.325 ; v1(86.45,49.825) 86.469,49.844 87.607,49.844 87.9,50.137 87.9,50.575 C23.2@88.075,50.75 88.082,50.757 88.082,51.682 88.525,52.125 89.925,52.125 ; v1(86.45,54.825) C24.1@87.85,54.825 89.925,54.825 ; v1(86.45,59.825) C25.1@87.85,59.825 89.875,59.825 89.925,59.775 ; v1(89.925,67.8) C10.1@89.925,66.4 ; v1(92.425,49.35) C28.2@92.425,50.75 92.425,52.1 92.4,52.125 ; v1(96.425,67.8) C16.2@96.425,66.4 96.425,65.025 96.4,65 ; v1(97.925,49.35) C29.2@97.925,50.75 97.925,52.1 97.9,52.125 ; v1@104.2,67.298 104.195,67.293 104.195,66.618 103.902,66.325 103.675,66.325 C33.2@103.5,66.15 103.493,66.143 102.568,66.143 101.425,65 ; v1(104.487,49.412) 104.487,49.439 104.425,49.501 C30.2@104.425,50.75 104.425,51.7 104,52.125 101.45,52.125 ; v1(104.9,55.825) C35.1@103.5,55.825 102.25,55.825 101.45,55.025 101.45,52.125 ; v1(104.9,60.825) C34.1@103.5,60.825 103.493,60.832 102.243,60.832 101.475,61.6 101.475,64.95 101.425,65 ; DD5A14.7@114.15,20 114.15,23.8 C64A14.1@114.075,23.875 114.075,30.1 v1(116.075,32.1) C56A14.1@116.95,32.1 117.125,31.925 117.6,31.925 118.175,31.35 119.025,31.35 DA10A14.2@119.05,31.325 ; C64A15.1@145.8,23.875 145.925,23.75 DD5A15.7@145.925,20 ; C64A15.1@145.85,23.875 145.85,30.175 v1(147.775,32.1) C56A15.1@148.65,32.1 ; C56A15.1@148.7,32.1 C56A15.1@148.65,32.1 ; DA10A15.2@150.825,31.325 150.8,31.35 149.975,31.35 149.4,31.925 148.825,31.925 C56A15.1@148.65,32.1 ; v1(166.525,65.3) 166.525,64.1 L7.1@166.575,64.05 ; v1(169.875,80.55) C88.1@175.6,80.55 175.775,80.725 DD8.5@177.275,80.725 ; v1(174.725,70.05) C86.1@175.6,70.05 175.775,70.225 DD6.5@177.15,70.225 ; v1(174.725,75.1) 174.752,75.1 174.777,75.125 175.425,75.125 175.775,75.475 DD7.5@177.275,75.475 ; v1(174.725,85.8) C90.1@175.6,85.8 175.775,85.975 DD9.5@177.175,85.975 ; R57.2@177.15,71.725 177.15,70.35 177.275,70.225 DD6.5@177.35,70.225 ; R58.2@177.15,76.975 177.15,75.6 DD7.5@177.275,75.475 ; R59.2@177.15,82.225 177.15,80.85 DD8.5@177.275,80.725 ; R62.2@177.15,87.475 177.15,86 DD9.5@177.175,85.975 ; DD9.5@177.2,85.95 DD9.5@177.175,85.975 ; DD7.5@177.35,75.475 DD7.5@177.275,75.475 ; DD8.5@177.35,80.725 DD8.5@177.275,80.725 ; DD9.5@177.35,85.975 DD9.5@177.175,85.975 ; v1(181.2,46.675) DA19.5@182.225,46.675 ; 89.925,52.125 92.4,52.125 ; 89.925,52.125 89.925,54.825 ; 89.925,54.825 89.925,59.775 ; 89.925,59.775 89.925,65 ; 89.925,65 C10.1@89.925,66.4 ; 89.925,65 96.4,65 ; 92.4,52.125 97.9,52.125 ; 96.4,65 101.425,65 ; 97.9,52.125 101.45,52.125
+3.3VA: C14.2 C17.2 C18.1 C43.1 C44.1 C58A11.1 C58A12.1 C58A13.1 C58A14.1 C58A15.1 DA6.4 DA9A11.5 DA9A12.5 DA9A13.5 DA9A14.5 DA9A15.5 DD1.32 DD1.33 L3.2 R18.3 R19A2.1 R19A3.1 R19A4.1 R19A5.1 | length 377.3
  Top Layer w0.3: DA9A11.5@25.875,31.325 26,31.45 26.575,31.45 26.95,31.825 27.3,31.825 C58A11.1@27.575,32.1 v1(28.6,32.1) ; v1(43.825,102.175) 46.675,102.175 ; R19A5.1@46.675,101.4 46.675,102.175 ; R19A4.1@49.575,101.4 49.55,101.425 49.55,102.175 ; R19A3.1@52.475,101.4 52.475,102.175 ; R19A2.1@55.375,101.4 55.325,101.4 55.05,101.675 55.05,101.999 54.874,102.175 52.475,102.175 ; DA9A12.5@57.65,31.325 57.775,31.45 58.35,31.45 58.725,31.825 59.05,31.825 C58A12.1@59.325,32.1 v1(60.35,32.1) ; C14.2@86.937,72.863 C14.2@86.975,72.9 ; DD1.33@88.425,69.3 88.675,69.3 ; C17.2@88.425,72.9 88.675,72.65 88.675,69.3 ; DD1.32@88.925,69.3 88.675,69.3 ; DA9A13.5@89.45,31.325 89.575,31.45 90.175,31.45 90.55,31.825 90.875,31.825 C58A13.1@91.15,32.1 v1(92.175,32.1) ; DA9A14.5@121.2,31.325 121.325,31.45 121.9,31.45 122.275,31.825 122.65,31.825 C58A14.1@122.925,32.1 ; C58A14.1@122.875,32.1 C58A14.1@122.925,32.1 ; v1(123.925,32.1) C58A14.1@122.925,32.1 ; DA9A15.5@152.975,31.325 153.1,31.45 153.7,31.45 154.075,31.825 154.45,31.825 C58A15.1@154.725,32.1 ; C58A15.1@154.675,32.1 C58A15.1@154.725,32.1 ; v1(155.75,32.1) C58A15.1@154.725,32.1 ; 46.675,102.175 49.55,102.175 ; 49.55,102.175 52.475,102.175
  Top Layer w0.5: R18.3@16.4,96.275 16.4,96.5 16.8,96.9 DA6.4@19.55,96.9 19.55,95.3 C43.1@19.725,95.125 C44.1@19.725,93.675 v1(19.725,92.65) ; v1(57.475,60.375) v1@57.475,68.288 ; v1(57.475,68.3) 57.487,68.288 58.488,68.288 C18.1@58.5,68.275 60,68.275 L3.2@60.175,68.1 ; v1(84.925,72.875) 84.937,72.887 86.913,72.887 C14.2@86.937,72.863 ; C14.2@86.975,72.9 C17.2@88.425,72.9
  Power Layer w0.5: v1@28.573,32.1 22.486,32.1 21.225,30.839 18.411,30.839 17.666,31.584 17.666,33.555 19.25,35.139 19.25,49.614 21.261,51.625 48.725,51.625 v1(57.475,60.375) ; v1@28.619,32.081 29.636,31.064 53.225,31.064 54.261,32.1 v1@60.323,32.1 ; v1(43.825,102.175) 40.75,105.25 33.35,105.25 30.7,107.9 23.65,107.9 19.725,103.975 v1(19.725,92.65) 35.075,92.65 57.475,70.25 v1(57.475,68.3) ; v1@60.369,32.081 61.5,30.95 84.836,30.95 85.986,32.1 v1@92.148,32.1 ; v1@92.194,32.081 93.186,31.089 116.775,31.089 117.786,32.1 v1@123.898,32.1 ; v1@123.944,32.081 124.886,31.139 154.775,31.139 v1@155.736,32.1
  GND Layer w0.5: v1@57.494,68.319 59.2,70.025 82.075,70.025 v1(84.925,72.875)
+3.3VA_ETH: C104.1 C115.1 C118.1 DD12.8 DD12.15 L7.2 XS1.2 XS1.5 | length 33.6
  Top Layer w0.3: DD12.15@171.075,60.951 v1(171.075,62.55) ; DD12.8@173.375,57.65 174.872,57.65 v1(174.891,57.632) ; XS1.2@184.275,53.127 185.575,54.427 185.575,55.697 XS1.5@186.815,56.937
  Bottom Layer w0.3: L7.2@168.575,64.05 168.725,63.9 C115.1@171.05,63.9 ; v1(171.075,62.55) 171.075,63.875 C115.1@171.05,63.9 ; v1(174.891,57.632) 175.457,57.632 ; XS1.5@186.815,56.937 C104.1@181.254,56.938 176.087,56.937 175.457,57.568 175.457,61.883 173.44,63.9 C118.1@172.517,63.9 C115.1@171.05,63.9
+5V: C3.1 C7.2 C8.1 C78.1 C79.1 DA1.6 DA3.4 DA4.3 DA4.4 DA15.2 DA16.2 L1.1 XP8.1 | length 257.4
  Top Layer w0.3: C79.1@170.946,95.993 C79.1@170.946,96.1 ; C79.1@170.946,96.15 171.216,96.421 171.612,96.421 172.041,96.85 DA16.2@172.846,96.85 ; C78.1@170.947,91.224 C78.1@170.959,91.212 ; C78.1@170.959,91.212 171.031,91.284 171.708,91.284 172.336,91.912 172.855,91.912 DA15.2@172.859,91.915
  Top Layer w0.5: L1.1@62.175,71.9 v1(63.45,71.9) ; v1(169.925,96.15) C79.1@170.946,96.15 ; v1@169.962,91.212 C78.1@170.959,91.212 ; v1(172.225,3.575) C8.1@173.225,3.575 174.35,3.575 174.85,4.075 DA4.3@174.85,4.85 ; v1(175.55,23) 176.475,23.925 C7.2@176.475,24.975 DA3.4@176.475,26.6 ; v1(177,3.575) DA4.4@177,4.85
  Power Layer w0.5: v1(63.45,71.9) 63.425,71.9 62.05,73.275 62.05,75.962 66.888,80.8 158.3,80.8 ; v1(175.55,23) 175.55,38.975 167.975,46.55 164.225,46.55 158.3,52.475 158.3,80.8 ; XP8.1@175.9,107.7 175.9,102.125 v1(169.925,96.15) 169.937,96.138 169.937,91.213 v1(169.95,91.2) 159.55,80.8 158.3,80.8
  Bottom Layer w0.5: v1(172.225,3.575) v1(177,3.575) 180.675,7.25 184.85,7.25 C3.1@184.895,7.205 ; v1(175.55,23) 181.825,16.725 181.825,12.375 184.85,9.35 C3.1@184.85,7.3
  Bottom Layer w1: C3.1@184.895,7.205 DA1.6@186.85,7.205
+5V_DRVA11: C61A11.1 C66A11.1 C68A11.1 C71A11.1 C72A11.1 DA12A11.1 DA13A11.2 DD5A11.10 DD5A11.16 U2A11.8 U3A11.1 | length 42.9
  Top Layer w0.5: v1(10.265,8.45) 10.277,8.462 11.077,8.462 C61A11.1@11.09,8.475 ; C61A11.1@11.115,8.475 11.19,8.55 U3A11.1@11.19,10.925 ; v1(21.515,11.6) C72A11.1@21.515,10.575 21.69,10.4 21.69,10.025 22.265,9.45 22.265,8.785 DA13A11.2@22.29,8.76 ; v1(29.24,8.475) C66A11.1@30.115,8.475 U2A11.8@30.115,11.1
  Power Layer w0.5: v1(10.265,8.45) 11.54,8.45 11.565,8.475 21.515,8.475 ; v1(21.515,11.6) 21.515,8.475 ; v1(29.24,8.475) 21.515,8.475
  Bottom Layer w0.5: v1(10.265,8.45) 10.277,8.437 11.052,8.437 C68A11.1@11.065,8.425 ; C71A11.1@10.61,6.62 10.61,5.028 DA12A11.1@10.635,5.003 ; C71A11.1@10.615,6.675 10.79,6.85 10.79,7.157 10.826,7.193 10.826,7.907 10.89,7.971 C68A11.1@10.89,8.2 ; C68A11.1@11.195,8.505 DD5A11.16@11.195,10.6 ; DD5A11.10@18.815,10.4 18.815,11.932 19.108,12.225 20.863,12.225 21.488,11.6 v1(21.515,11.6)
+5V_DRVA12: C61A12.1 C66A12.1 C68A12.1 C71A12.1 C72A12.1 DA12A12.1 DA13A12.2 DD5A12.10 DD5A12.16 U2A12.8 U3A12.1 | length 42.9
  Top Layer w0.5: v1(42.05,8.45) 42.062,8.463 42.862,8.463 C61A12.1@42.875,8.475 ; C61A12.1@42.9,8.475 42.975,8.55 U3A12.1@42.975,10.925 ; v1(53.3,11.6) C72A12.1@53.3,10.575 53.475,10.4 53.475,10.025 54.05,9.45 54.05,8.785 DA13A12.2@54.075,8.76 ; v1(61.025,8.475) C66A12.1@61.9,8.475 U2A12.8@61.9,11.1
  Power Layer w0.5: v1(42.05,8.45) 43.325,8.45 43.35,8.475 53.3,8.475 ; v1(53.3,11.6) 53.3,8.475 ; v1(61.025,8.475) 53.3,8.475
  Bottom Layer w0.5: v1(42.05,8.45) 42.062,8.438 42.837,8.438 C68A12.1@42.85,8.425 ; C71A12.1@42.395,6.62 42.395,5.028 DA12A12.1@42.42,5.003 ; C71A12.1@42.4,6.675 42.575,6.85 42.575,7.157 42.611,7.193 42.611,7.907 42.675,7.971 C68A12.1@42.675,8.2 ; C68A12.1@42.98,8.505 DD5A12.16@42.98,10.6 ; DD5A12.10@50.6,10.4 50.6,11.932 50.893,12.225 52.648,12.225 53.273,11.6 v1(53.3,11.6)
+5V_DRVA13: C61A13.1 C66A13.1 C68A13.1 C71A13.1 C72A13.1 DA12A13.1 DA13A13.2 DD5A13.10 DD5A13.16 U2A13.8 U3A13.1 | length 42.9
  Top Layer w0.5: v1(73.825,8.45) 73.837,8.463 74.637,8.463 C61A13.1@74.65,8.475 ; C61A13.1@74.675,8.475 74.75,8.55 U3A13.1@74.75,10.925 ; v1(85.075,11.6) C72A13.1@85.075,10.575 85.25,10.4 85.25,10.025 85.825,9.45 85.825,8.785 DA13A13.2@85.85,8.76 ; v1(92.8,8.475) C66A13.1@93.675,8.475 U2A13.8@93.675,11.1
  Power Layer w0.5: v1(73.825,8.45) 75.1,8.45 75.125,8.475 85.075,8.475 ; v1(85.075,11.6) 85.075,8.475 ; v1(92.8,8.475) 85.075,8.475
  Bottom Layer w0.5: v1(73.825,8.45) 73.837,8.438 74.612,8.438 C68A13.1@74.625,8.425 ; C71A13.1@74.17,6.62 74.17,5.028 DA12A13.1@74.195,5.003 ; C71A13.1@74.175,6.675 74.35,6.85 74.35,7.157 74.386,7.193 74.386,7.907 74.45,7.971 C68A13.1@74.45,8.2 ; C68A13.1@74.755,8.505 DD5A13.16@74.755,10.6 ; DD5A13.10@82.375,10.4 82.375,11.932 82.668,12.225 84.423,12.225 85.048,11.6 v1(85.075,11.6)
+5V_DRVA14: C61A14.1 C66A14.1 C68A14.1 C71A14.1 C72A14.1 DA12A14.1 DA13A14.2 DD5A14.10 DD5A14.16 U2A14.8 U3A14.1 | length 42.9
  Top Layer w0.5: v1(105.6,8.45) 105.612,8.463 106.412,8.463 C61A14.1@106.425,8.475 ; C61A14.1@106.45,8.475 106.525,8.55 U3A14.1@106.525,10.925 ; v1(116.85,11.6) C72A14.1@116.85,10.575 117.025,10.4 117.025,10.025 117.6,9.45 117.6,8.785 DA13A14.2@117.625,8.76 ; v1(124.575,8.475) C66A14.1@125.45,8.475 U2A14.8@125.45,11.1
  Power Layer w0.5: v1(105.6,8.45) 106.875,8.45 106.9,8.475 116.85,8.475 ; v1(116.85,11.6) 116.85,8.475 ; v1(124.575,8.475) 116.85,8.475
  Bottom Layer w0.5: v1(105.6,8.45) 105.612,8.438 106.387,8.438 C68A14.1@106.4,8.425 ; C71A14.1@105.945,6.62 105.945,5.028 DA12A14.1@105.97,5.003 ; C71A14.1@105.95,6.675 106.125,6.85 106.125,7.157 106.161,7.193 106.161,7.907 106.225,7.971 C68A14.1@106.225,8.2 ; C68A14.1@106.53,8.505 DD5A14.16@106.53,10.6 ; DD5A14.10@114.15,10.4 114.15,11.932 114.443,12.225 116.198,12.225 116.823,11.6 v1(116.85,11.6)
+5V_DRVA15: C61A15.1 C66A15.1 C68A15.1 C71A15.1 C72A15.1 DA12A15.1 DA13A15.2 DD5A15.10 DD5A15.16 U2A15.8 U3A15.1 | length 42.9
  Top Layer w0.5: v1(137.375,8.45) 137.387,8.463 138.187,8.463 C61A15.1@138.2,8.475 ; C61A15.1@138.225,8.475 138.3,8.55 U3A15.1@138.3,10.925 ; v1(148.625,11.6) C72A15.1@148.625,10.575 148.8,10.4 148.8,10.025 149.375,9.45 149.375,8.785 DA13A15.2@149.4,8.76 ; v1(156.35,8.475) C66A15.1@157.225,8.475 U2A15.8@157.225,11.1
  Power Layer w0.5: v1(137.375,8.45) 138.65,8.45 138.675,8.475 148.625,8.475 ; v1(148.625,11.6) 148.625,8.475 ; v1(156.35,8.475) 148.625,8.475
  Bottom Layer w0.5: v1(137.375,8.45) 137.387,8.438 138.162,8.438 C68A15.1@138.175,8.425 ; C71A15.1@137.72,6.62 137.72,5.028 DA12A15.1@137.745,5.003 ; C71A15.1@137.725,6.675 137.9,6.85 137.9,7.157 137.936,7.193 137.936,7.907 138,7.971 C68A15.1@138,8.2 ; C68A15.1@138.305,8.505 DD5A15.16@138.305,10.6 ; DD5A15.10@145.925,10.4 145.925,11.932 146.218,12.225 147.973,12.225 148.598,11.6 v1(148.625,11.6)
+5V_FS: C92.1 C93.1 C94.1 DA18.4 DD10.1 DD10.3 XP13.2 | length 26.9
  Top Layer w0.3: DD10.1@189.325,38.025 188.05,38.025 187.85,38.225 187.85,40.375 188.05,40.575 DD10.3@189.325,40.575
  Top Layer w0.5: DD10.3@189.325,40.575 191.325,40.575 C92.1@191.45,40.7 C93.1@194.35,40.7 196.525,40.7 XP13.2@197.65,39.575
  Bottom Layer w0.5: XP13.2@197.65,39.575 195.625,37.55 195.625,34.625 197.525,32.725 C94.1@197.525,30.775 197.575,30.775 C94.1@197.925,30.425
  Bottom Layer w1: DA18.4@197.925,28.625 C94.1@197.925,30.425
+5V_PSA6: C48A6.1 C49A6.1 C52A6.1 C53A6.1 DA7A6.2 DA8A6.1 DD3A6.8 DD4A6.1 R23A6.1 R24A6.1
+5V_PSA7: C48A7.1 C49A7.1 C52A7.1 C53A7.1 DA7A7.2 DA8A7.1 DD3A7.8 DD4A7.1 R23A7.1 R24A7.1
+5V_PSA8: C48A8.1 C49A8.1 C52A8.1 C53A8.1 DA7A8.2 DA8A8.1 DD3A8.8 DD4A8.1 R23A8.1 R24A8.1
+5V_PSA9: C48A9.1 C49A9.1 C52A9.1 C53A9.1 DA7A9.2 DA8A9.1 DD3A9.8 DD4A9.1 R23A9.1 R24A9.1
+5V_PSA10: C48A10.1 C49A10.1 C52A10.1 C53A10.1 DA7A10.2 DA8A10.1 DD3A10.8 DD4A10.1 R23A10.1 R24A10.1 | length 34.9
  Top Layer w0.3: DD4A10.1@67.85,95.2 C49A10.1@67.85,97.45 v1(68.725,97.45) ; DD3A10.8@72.5,95.2 C48A10.1@72.5,97.45 v1(73.375,97.45)
  Top Layer w0.5: v1(71.625,102.6) C52A10.1@72.5,102.6 72.675,102.425 73.149,102.425 73.829,101.745 74.605,101.745 DA7A10.2@74.63,101.72
  Bottom Layer w0.5: R24A10.1@66.55,98.75 R23A10.1@68,98.75 68.018,98.75 68.193,98.575 68.193,97.982 v1@68.706,97.469 ; v1(68.725,97.45) v1(73.375,97.45) 73.375,98.725 71.625,100.475 v1(71.625,102.6) 79.825,102.6 80.45,103.225 C53A10.1@80.45,104.225 80.425,104.25 80.425,105.775 DA8A10.1@80.4,105.8
+5VA: C5.1 C39.1 C40.1 C60A11.1 C60A12.1 C60A13.1 C60A14.1 C60A15.1 C67A11.1 C67A12.1 C67A13.1 C67A14.1 C67A15.1 C73A11.1 C73A12.1 C73A13.1 C73A14.1 C73A15.1 C123A24.1 C123A25.1 C123A26.1 C123A27.1 C123A28.1 C125A24.1 C125A25.1 C125A26.1 C125A27.1 C125A28.1 DA5.7 DA5.8 DA14A11.2 DA14A12.2 DA14A13.2 DA14A14.2 DA14A15.2 DA20A24.2 DA20A25.2 DA20A26.2 DA20A27.2 DA20A28.2 L1.2 U2A11.1 U2A12.1 U2A13.1 U2A14.1 U2A15.1 U3A11.8 U3A12.8 U3A13.8 U3A14.8 U3A15.8 U11A24.8 U11A25.8 U11A26.8 U11A27.8 U11A28.8 | length 449
  Top Layer w0.5: U3A11.8@11.2,21.675 C67A11.1@11.2,25.625 ; C67A11.1@11.212,25.637 11.219,25.631 v1(12.209,25.631) ; DA14A11.2@19.04,25.325 19.065,25.3 19.065,24.675 19.665,24.075 19.665,23.645 19.8,23.51 v1(19.8,22.525) ; U11A28.8@24.1,61.344 24.103,61.347 27.047,61.347 C123A28.1@27.05,61.35 v1(27.05,62.225) ; U11A27.8@24.1,67.719 24.103,67.722 27.047,67.722 C123A27.1@27.05,67.725 v1(27.05,68.6) ; U11A26.8@24.1,74.094 24.115,74.11 27.035,74.11 C123A26.1@27.05,74.125 v1(27.05,75) ; U11A24.8@24.106,86.85 C123A24.1@27.05,86.85 v1(27.05,87.725) ; U11A25.8@24.131,80.5 C123A25.1@27.05,80.5 v1(27.05,81.375) ; v1(24.95,98.075) DA5.8@24.95,98.8 DA5.7@24.95,100.05 ; U2A11.1@30.09,21.675 30.09,25.552 C60A11.1@30.175,25.637 ; C60A11.1@30.165,25.65 30.177,25.637 31.238,25.637 v1(31.25,25.625) ; v1(30.8,56.3) C125A28.1@31.625,56.3 31.8,56.475 31.8,56.875 32.35,57.425 32.35,58.1 DA20A28.2@32.375,58.125 ; v1(30.8,62.65) C125A27.1@31.625,62.65 31.8,62.825 31.8,63.25 32.35,63.8 32.35,64.475 DA20A27.2@32.375,64.5 ; v1(30.8,69.025) 30.812,69.037 31.613,69.037 C125A26.1@31.625,69.05 31.8,69.225 31.8,69.625 32.35,70.175 32.35,70.875 DA20A26.2@32.375,70.9 ; v1(30.8,75.425) C125A25.1@31.625,75.425 31.8,75.6 31.8,76 32.35,76.55 32.35,77.25 DA20A25.2@32.375,77.275 ; v1(30.8,81.775) 31.525,81.775 31.8,82.05 31.8,82.346 32.35,82.896 32.35,83.569 DA20A24.2@32.375,83.594 ; U3A12.8@42.975,21.675 42.975,25.6 43.025,25.65 v1(44,25.65) ; DA14A12.2@50.8,25.325 50.8,24.375 C73A12.1@51.537,23.638 ; v1(51.575,22.525) C73A12.1@51.575,23.55 ; v1(57.475,72.05) C5.1@58.5,72.05 ; C5.1@58.5,72.05 60.025,72.05 L1.2@60.175,71.9 ; U2A12.1@61.894,21.681 61.894,25.606 61.938,25.65 C60A12.1@62,25.65 62.013,25.663 63.013,25.663 v1(63.025,25.675) ; U3A13.8@74.75,21.675 74.75,25.6 74.8,25.65 v1(75.775,25.65) ; DA14A13.2@82.575,25.325 82.575,24.375 C73A13.1@83.312,23.638 ; v1(83.35,22.525) C73A13.1@83.35,23.55 ; U2A13.1@93.669,21.681 93.669,25.519 93.8,25.65 v1(94.8,25.65) ; U3A14.8@106.525,21.675 106.525,25.6 106.575,25.65 v1(107.55,25.65) ; DA14A14.2@114.35,25.325 114.35,24.375 C73A14.1@115.087,23.638 ; v1(115.1,22.525) 115.112,22.537 115.112,23.538 C73A14.1@115.125,23.55 ; U2A14.1@125.45,21.675 125.45,25.55 C60A14.1@125.55,25.65 v1(126.575,25.65) ; U3A15.8@138.3,21.675 138.3,25.6 138.35,25.65 v1(139.325,25.65) ; DA14A15.2@146.125,25.325 146.125,24.375 C73A15.1@146.862,23.638 ; v1(146.9,22.525) C73A15.1@146.9,23.55 ; U2A15.1@157.219,21.681 157.219,25.606 157.263,25.65 C60A15.1@157.325,25.65 v1(158.35,25.65)
  Power Layer w0.5: v1(19.8,22.525) 19.8,25.578 ; v1(26.2,95.35) 36.125,95.35 57.475,74 v1(57.475,72.05) 59.125,70.4 59.125,65.375 47,53.25 27.05,53.25 ; v1(27.05,87.725) v1(27.05,81.375) v1(27.05,75) v1(27.05,68.6) v1(27.05,62.225) ; v1@27.077,68.6 30.375,68.6 v1(30.8,69.025) ; v1@27.077,75 30.375,75 v1(30.8,75.425) ; v1@27.077,81.375 30.4,81.375 v1(30.8,81.775) ; v1(30.8,56.3) 27.05,56.3 ; v1(30.8,62.65) 30.375,62.225 v1(27.05,62.225) ; v1(51.575,22.525) 51.575,25.663 ; v1(83.35,22.525) 83.35,25.625 83.375,25.65 ; v1(115.1,22.525) 115.1,25.625 115.125,25.65 ; v1(146.9,22.525) 146.9,25.625 146.925,25.65 ; v1(158.35,25.65) 146.925,25.65 ; 19.8,25.578 19.85,25.628 31.247,25.628 v1(31.25,25.625) 31.263,25.638 43.988,25.638 v1(44,25.65) 44.013,25.663 51.575,25.663 ; 19.8,25.578 12.289,25.578 12.236,25.631 v1(12.209,25.631) 12.209,30.084 16.925,34.8 16.925,49.5 20.675,53.25 27.05,53.25 ; 27.05,53.25 27.05,56.3 ; 27.05,56.3 v1(27.05,62.225) ; 51.575,25.663 63.013,25.663 v1(63.025,25.675) 63.037,25.663 75.762,25.663 v1(75.775,25.65) 83.375,25.65 ; 83.375,25.65 v1(94.8,25.65) v1(107.55,25.65) 115.125,25.65 ; 115.125,25.65 v1(126.575,25.65) 146.925,25.65
  Bottom Layer w0.5: v1(24.95,98.075) 24.969,98.056 24.969,97.756 25.35,97.375 26.2,97.375 C40.1@26.55,97.025 26.825,97.025 27.175,96.675 C39.1@27.175,95.35 v1(26.2,95.35)
+5VA_CS: C6.1 C121A24.1 C121A25.1 C121A26.1 C121A27.1 C121A28.1 L2.2 U11A24.1 U11A25.1 U11A26.1 U11A27.1 U11A28.1 | length 54.7
  Top Layer w0.5: C121A28.1@10.975,61.344 C121A28.1@10.975,61.419 ; v1(10.975,62.369) C121A28.1@10.975,61.419 ; C121A27.1@10.975,67.719 U11A27.1@13.35,67.719 ; C121A27.1@10.975,67.744 v1(10.975,68.769) ; v1(10.975,75.119) C121A26.1@10.975,74.094 U11A26.1@13.35,74.094 ; v1(10.975,81.494) C121A25.1@10.975,80.469 U11A25.1@13.35,80.469 ; v1(10.975,87.869) C121A24.1@10.975,86.844 U11A24.1@13.35,86.844 ; U11A28.1@13.35,61.344 11.05,61.344 C121A28.1@10.975,61.419
  Power Layer w0.5: v1(1.6,62.369) v1(10.975,62.369) v1(10.975,68.769) v1(10.975,75.119) v1(10.975,81.494) v1(10.975,87.869)
  Bottom Layer w0.5: v1(1.6,62.369) 1.627,62.369 1.761,62.504 2.4,62.504 2.575,62.679 C6.1@2.575,62.694 2.4,62.519 L2.2@2.4,61.119
+12V: C82.1 DA17.1 XP11.7 | length 9.8
  Bottom Layer w0.5: DA17.1@188.7,76.925 189.115,76.925 189.15,76.89 189.15,76.1 189.8,75.45 190.15,75.45 190.325,75.275 C82.1@190.325,75.225 ; C82.1@190.5,75.05 190.5,74.65 191.275,73.875 195.5,73.875 XP11.7@196.375,74.75
+12V_DRVA11: C59A11.1 C65A11.2 DA11A11.6 DA12A11.3 XP7A11.1 | length 29.1
  Power Layer w1: XP7A11.1@17.665,3.625 21.245,7.205 DA11A11.6@37.425,7.205
  Bottom Layer w0.5: DA12A11.3@13.74,5.025 16.973,5.025 17.315,4.683 17.315,3.975 XP7A11.1@17.665,3.625
  Bottom Layer w1: C59A11.1@34.6,7.45 34.788,7.262 37.368,7.262 DA11A11.6@37.425,7.205
+12V_DRVA12: C59A12.1 C65A12.2 DA11A12.6 DA12A12.3 XP7A12.1 | length 29.2
  Power Layer w1: XP7A12.1@49.45,3.625 53.03,7.205 DA11A12.6@69.2,7.205
  Bottom Layer w0.5: DA12A12.3@45.42,5.003 45.42,4.947 45.455,4.912 C65A12.2@47.32,4.912 ; C65A12.2@47.328,4.903 48.864,4.903 49.157,4.611 49.157,3.956 XP7A12.1@49.46,3.653
  Bottom Layer w1: C59A12.1@66.375,7.425 66.538,7.262 69.143,7.262 DA11A12.6@69.2,7.205
+12V_DRVA13: C59A13.1 C65A13.2 DA11A13.6 DA12A13.3 XP7A13.1 | length 29.2
  Power Layer w1: XP7A13.1@81.225,3.625 84.805,7.205 DA11A13.6@100.975,7.205
  Bottom Layer w0.5: DA12A13.3@77.195,5.003 77.195,4.947 77.23,4.912 C65A13.2@79.095,4.912 ; C65A13.2@79.103,4.903 80.639,4.903 80.932,4.611 80.932,3.956 XP7A13.1@81.235,3.653
  Bottom Layer w1: C59A13.1@98.15,7.45 98.338,7.262 100.918,7.262 DA11A13.6@100.975,7.205
+12V_DRVA14: C59A14.1 C65A14.2 DA11A14.6 DA12A14.3 XP7A14.1 | length 29.1
  Power Layer w1: XP7A14.1@113.01,3.653 116.562,7.205 DA11A14.6@132.75,7.205
  Bottom Layer w0.5: DA12A14.3@108.97,5.003 108.97,4.947 109.005,4.912 C65A14.2@110.87,4.912 ; C65A14.2@110.878,4.903 112.414,4.903 112.707,4.611 112.707,3.956 XP7A14.1@113.01,3.653
  Bottom Layer w1: C59A14.1@129.925,7.45 130.113,7.262 132.693,7.262 DA11A14.6@132.75,7.205
+12V_DRVA15: C59A15.1 C65A15.2 DA11A15.6 DA12A15.3 XP7A15.1 | length 29.1
  Power Layer w1: XP7A15.1@144.785,3.653 148.337,7.205 DA11A15.6@164.525,7.205
  Bottom Layer w0.5: DA12A15.3@140.745,5.003 140.745,4.947 140.78,4.912 C65A15.2@142.645,4.912 ; C65A15.2@142.653,4.903 144.189,4.903 144.482,4.611 144.482,3.956 XP7A15.1@144.785,3.653
  Bottom Layer w1: C59A15.1@161.7,7.45 161.888,7.262 164.468,7.262 DA11A15.6@164.525,7.205
+12V_PSA6: C51A6.2 C54A6.1 DA8A6.3 U1A6.4 XP6A6.1
+12V_PSA7: C51A7.2 C54A7.1 DA8A7.3 U1A7.4 XP6A7.1
+12V_PSA8: C51A8.2 C54A8.1 DA8A8.3 U1A8.4 XP6A8.1
+12V_PSA9: C51A9.2 C54A9.1 DA8A9.3 U1A9.4 XP6A9.1
+12V_PSA10: C51A10.2 C54A10.1 DA8A10.3 U1A10.4 XP6A10.1 | length 18.9
  Top Layer w0.5: U1A10.4@69.55,95.425 v1(69.55,96.625)
  Power Layer w0.3: v1(69.55,96.625) 70.75,97.825 XP6A10.1@70.75,106.375
  Bottom Layer w0.5: XP6A10.1@70.785,106.41 72.29,106.41 73.05,105.65 C54A10.1@73.15,105.65 73.625,106.125 77.365,106.125 77.4,106.09 DA8A10.3@77.4,105.8
+24V: C1.1 C2.1 C57A11.1 C57A12.1 C57A13.1 C57A14.1 C57A15.1 C81.2 C91.1 DA1.2 DA2.2 DA11A11.2 DA11A12.2 DA11A13.2 DA11A14.2 DA11A15.2 DA17.3 DA18.2 XP4.1 XP9.1 XP9.3 XP9.5 XP10.1 XP10.3 XP10.5 | length 355.2
  Power Layer w1: DA2.2@7.16,54.994 7.16,53.409 14.275,46.294 14.275,36.775 5.5,28 5.5,20.15 8.285,17.365 DA11A12.2@69.2,17.365 DA11A13.2@100.975,17.365 DA11A14.2@132.75,17.365 DA11A15.2@164.525,17.365 DA1.2@186.855,17.365 ; DA18.2@192.845,28.625 192.845,29.855 186.8,35.9 186.8,42.275 190.025,45.5 192.35,45.5 195.575,48.725 195.575,64.5 194.35,65.725 194.35,78.275 XP9.1@196.375,80.3 XP9.3@196.375,82.3 XP9.5@196.375,84.3 ; XP9.5@196.337,84.338 194.375,86.3 194.375,88.05 196.375,90.05 XP10.1@196.375,91.85 XP10.3@196.375,93.85 XP10.5@196.375,95.85
  Bottom Layer w0.5: DA17.3@189.15,80.066 189.15,80.7 189.43,80.98 189.43,81.515 C81.2@189.815,81.9 ; C81.2@190.001,81.951 190.2,82.15 190.2,82.85 191.65,84.3 XP9.5@196.375,84.3